# Altium PCB chinook_pcb_rotor.PcbDoc (part 1 of 2)
Units mil, origin at the board's own origin, x right, y up, seen from the top; angles counter-clockwise.
Board outline 4240 x 2750 mil, 2 copper layers (Top Layer, Bottom Layer); 69 components, 52 nets, 279 pads, 85 vias.
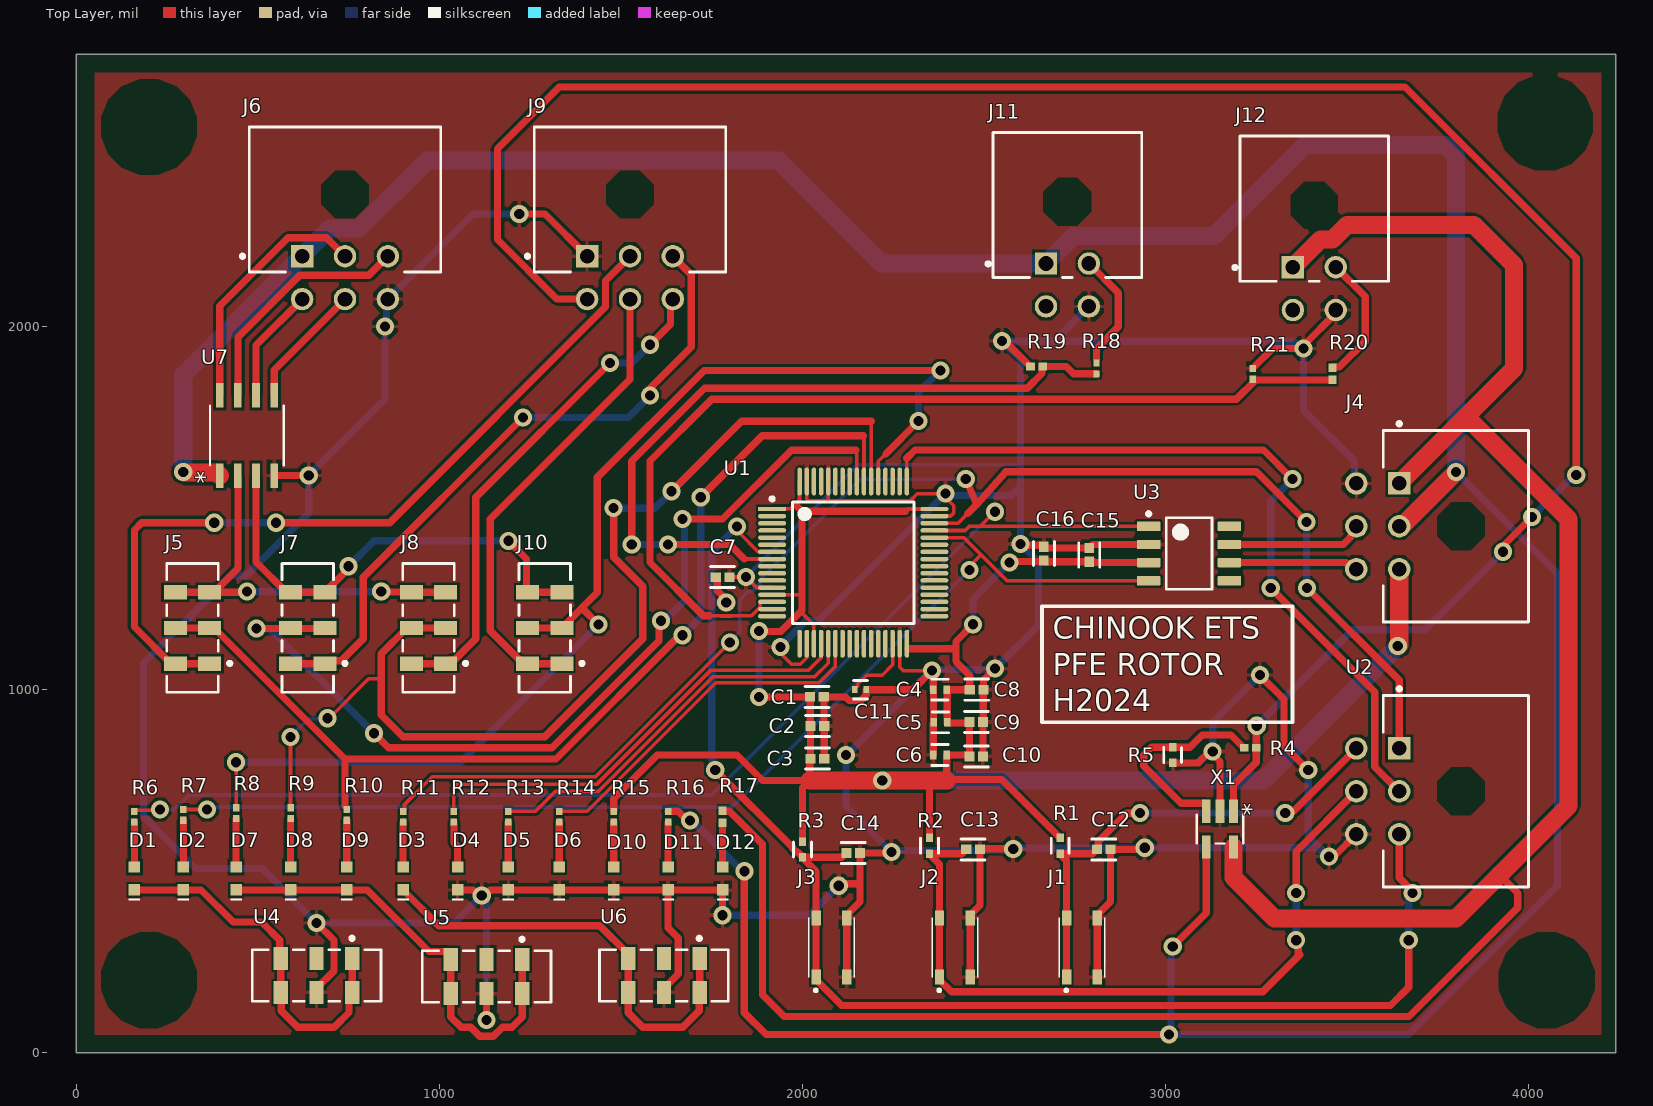
[diagram p0: Top Layer view]
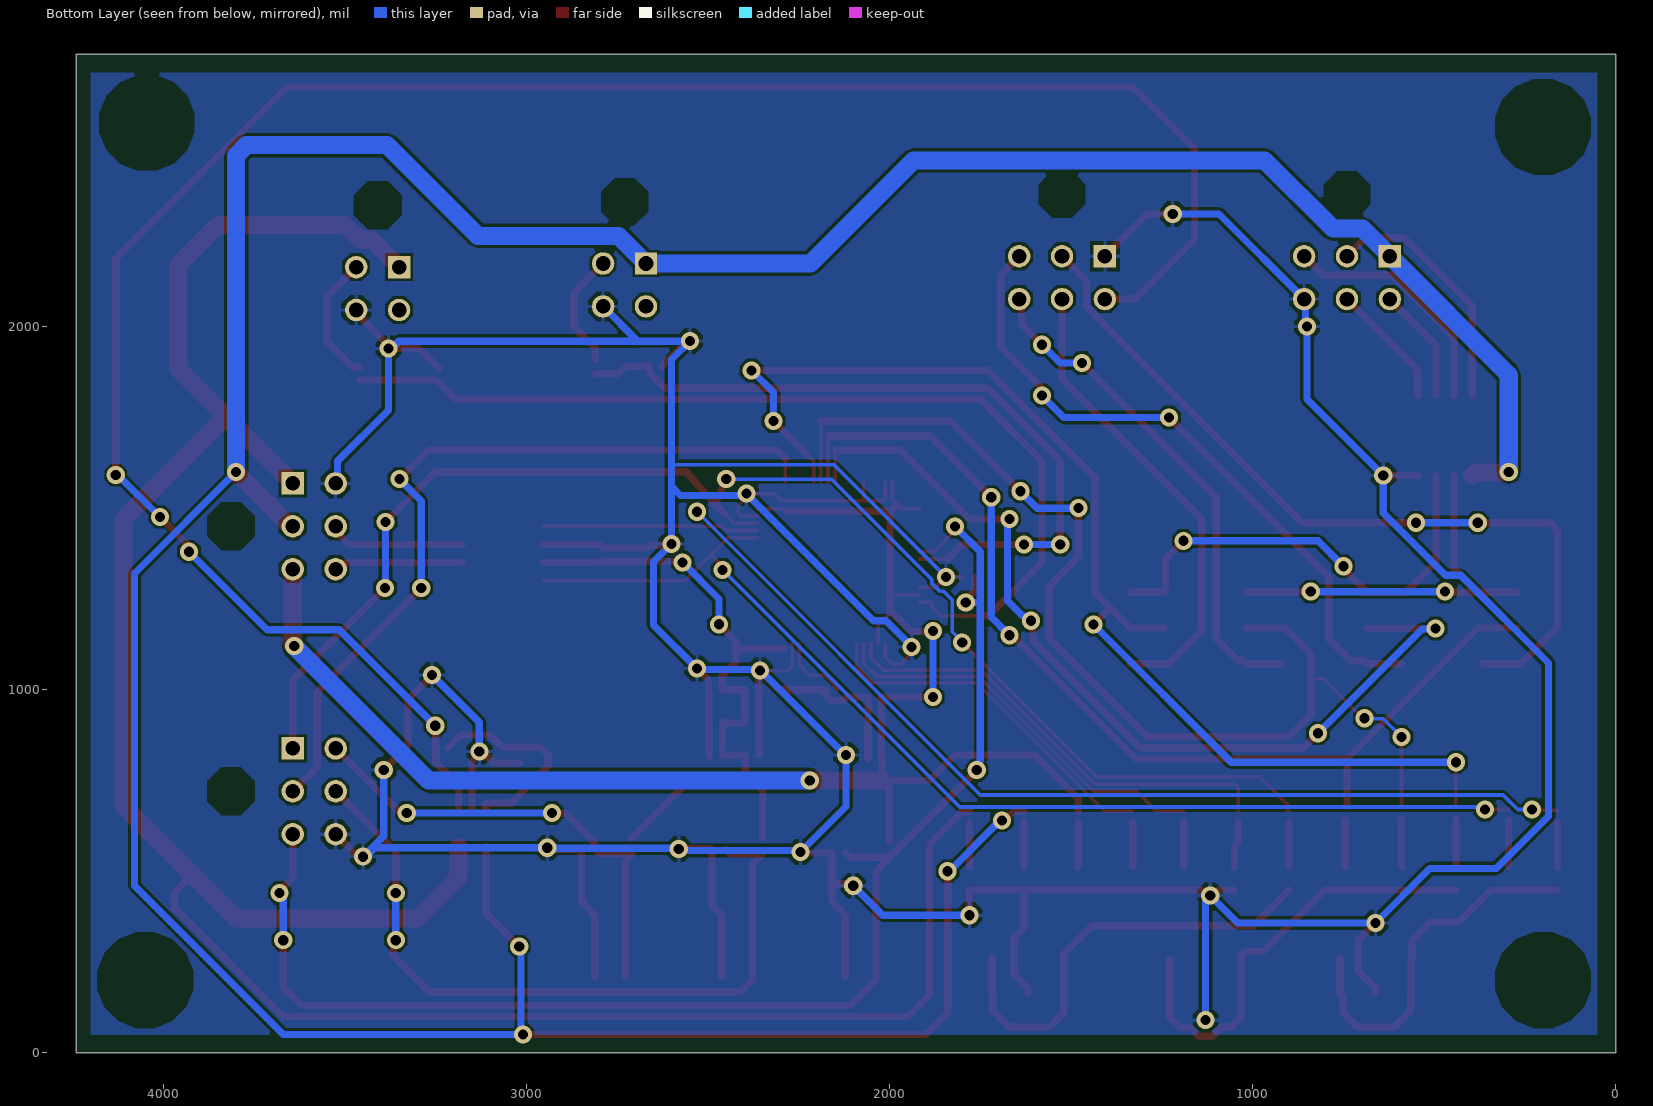
[diagram p1: Bottom Layer view, seen from below]
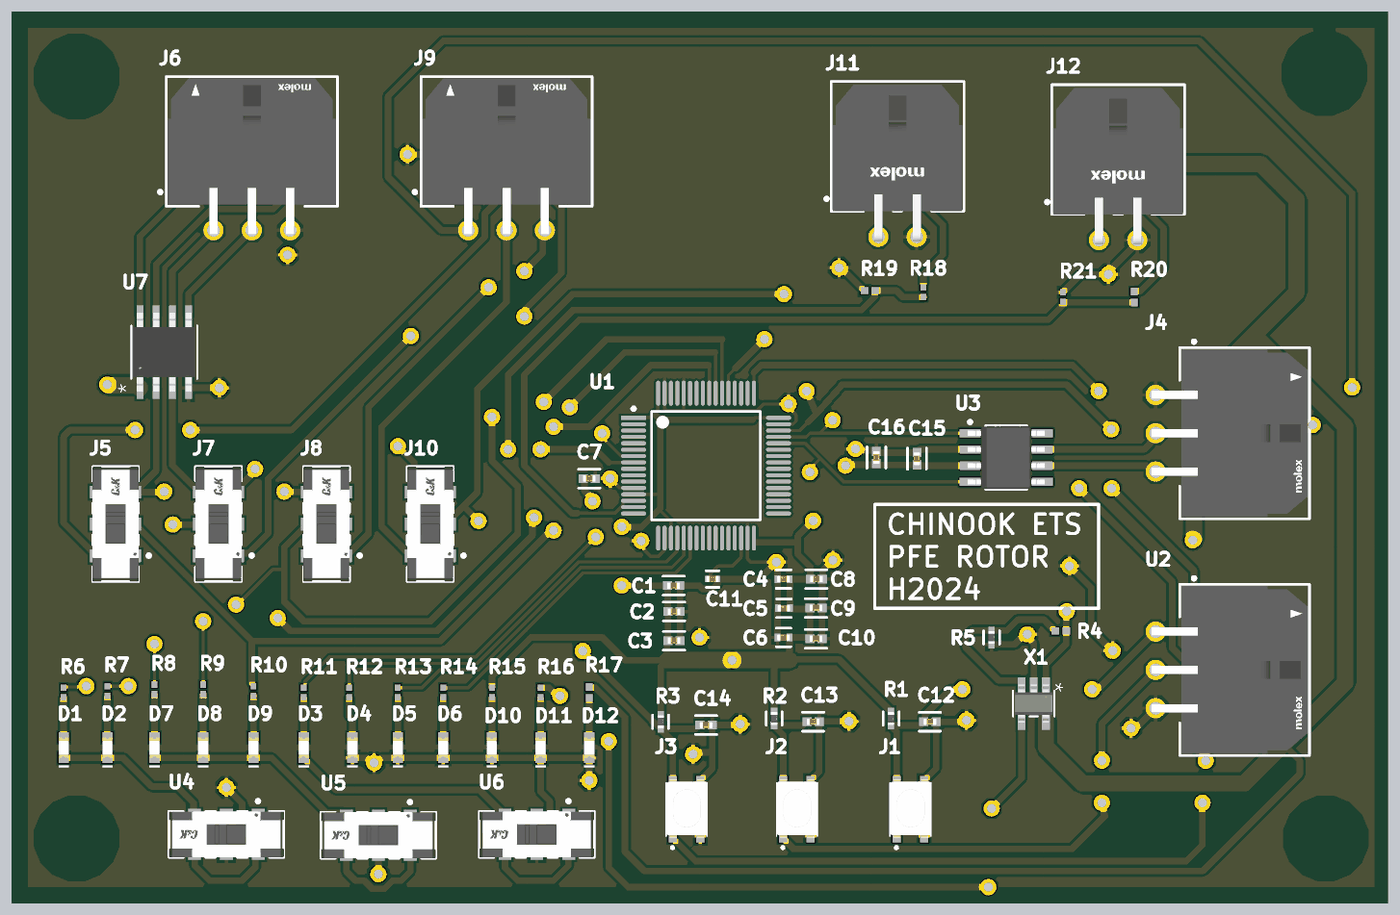
[diagram p2: 3D render of the assembled board from above, using the file's embedded part models]

## Layer stack, top to bottom
Top Solder: solder mask 0.4, Solder Resist, Dk 3.5
Top Layer: signal copper 1.4
Dielectric 1: dielectric 12.6, FR-4, Dk 4.8
Bottom Layer: signal copper 1.4
Bottom Solder: solder mask 0.4, Solder Resist, Dk 3.5

## Board outline
0,0 4240,0 4240,2750 0,2750

## Design rules (kind name [scope] priority, off if disabled: settings)
Clearance constraint [All] p1: gap=7 ignorepadtopadclearanceinfootprint=FALSE
Clearance [All] p2: gap=10 ignorepadtopadclearanceinfootprint=FALSE
HoleSize [All] p1: absolutevalues=TRUE maxlimit=150 minlimit=1 maxpercent=80.000 minpercent=20.000
PolygonConnect [All] p1: connectstyle=Relief reliefconductorwidth=10 reliefentries=4 polygonreliefangle="90 Angle" airgapwidth=10
RoutingVias [All] p1: holewidth=28 width=50 viastyle="Through Hole" minholewidth=28 minwidth=50 maxholewidth=28 maxwidth=50
SolderMaskExpansion [All] p1: expansion=4 istentingtop=FALSE
Width [All] p1: maxlimit=50 minlimit=10 preferedwidth=20
29 further rules are at their usual default settings.

## Classes and differential pairs
component class MCU: C1 C2 C3 C4 C5 C6 C7 C8 C9 C10 C11 U1
component class led: D1 D2 D3 D4 D5 D6 D7 D8 D9 D10 D11 D12 R6 R7 R8 R9 R10 R11 R12 R13 R14 R15 R16 R17 U4 U5 U6
component class encodeur_rotor_rpm: J11 R18 R19
component class encodeur_pale: J5 J6 J7 J8 J9 J10 U7
component class debug: C12 C13 C14 J1 J2 J3 R1 R2 R3 U2
component class connecteur_principal: J4
component class capteur_couple: J12 R20 R21
component class can: C15 C16 U3
component class alimentation: R4 R5 X1

## Components (designator, comment, footprint, x,y, rotation, side; value= is the part's Value field where it differs from the comment)
C1 "1uF" FP-GRM155-0_05-IPC_A 2040,980 r0 top
C2 "1uF" FP-GRM155-0_05-IPC_A 2041.16,900 r0 top
C3 "1uF" FP-GRM155-0_05-IPC_A 2041.16,810 r0 top
C4 "10uF" FP-GRM155-0_15-MFG 2378.7,1000 r180 top
C5 "10uF" FP-GRM155-0_15-MFG 2380,910 r180 top
C6 "10uF" FP-GRM155-0_15-MFG 2378.7,820 r180 top
C7 "100nF" FP-CL278-IPC_A 1780,1310 r0 top
C8 "100nF" FP-CL278-IPC_A 2480,1000 r0 top
C9 "100nF" FP-CL278-IPC_A 2478.84,911.01 r0 top
C10 "100nF" FP-CL278-IPC_A 2478.84,816.01 r0 top
C11 "2.2uF" FP-GRM155-0_05-MFG 2160,1000 r0 top
C12 "100nF" FP-CL278-IPC_A 2830,560 r0 top
C13 "100nF" FP-CL278-IPC_A 2470,560 r0 top
C14 "100nF" FP-CL278-IPC_A 2140,550 r0 top
C15 "1uF" FP-GRM155-0_05-IPC_A 2790,1371.16 r90 top
C16 "100nF" FP-CL278-IPC_A 2665,1375 r90 top
D1 "Green led 0603" WL-SMCW_0603_150060xx75000 160,480 r90 top
D2 "Green led 0603" WL-SMCW_0603_150060xx75000 295,480 r90 top
D3 "Green led 0603" WL-SMCW_0603_150060xx75000 900,480 r90 top
D4 "Green led 0603" WL-SMCW_0603_150060xx75000 1050,480 r90 top
D5 "Green led 0603" WL-SMCW_0603_150060xx75000 1190,480 r90 top
D6 "Green led 0603" WL-SMCW_0603_150060xx75000 1330,480 r90 top
D7 "Green led 0603" WL-SMCW_0603_150060xx75000 440,480 r90 top
D8 "Green led 0603" WL-SMCW_0603_150060xx75000 590,480 r90 top
D9 "Green led 0603" WL-SMCW_0603_150060xx75000 745,480 r90 top
D10 "Green led 0603" WL-SMCW_0603_150060xx75000 1480,480 r90 top
D11 "Green led 0603" WL-SMCW_0603_150060xx75000 1630,480 r90 top
D12 "Green led 0603" WL-SMCW_0603_150060xx75000 1780,480 r90 top
J1 "bouton off default" PTS810SJG250SMTRLFS 2770,290 r90 top
J2 "bouton off default" PTS810SJG250SMTRLFS 2420,290 r90 top
J3 "bouton off default" PTS810SJG250SMTRLFS 2080,290 r90 top
J4 "micro-fit 3.0 6 pins female pcb" FP-0430450600-MFG 3800,1450 r90 top
J5 "Switch on off" FP-JS202011JCQN-MFG 320,1170 r90 top
J6 "micro-fit 3.0 6 pins female pcb" FP-0430450600-MFG 740,2350 r180 top
J7 "Switch on off" FP-JS202011JCQN-MFG 637.24,1170 r90 top
J8 "Switch on off" FP-JS202011JCQN-MFG 970,1170 r90 top
J9 "micro-fit 3.0 6 pins female pcb" FP-0430450600-MFG 1525,2350 r180 top
J10 "Switch on off" FP-JS202011JCQN-MFG 1290,1170 r90 top
J11 "micro-fit 3.0 4 pins female pcb" FP-43045-0400-MFG 2730,2330 r180 top
J12 "micro-fit 3.0 4 pins female pcb" FP-43045-0400-MFG 3410,2320 r180 top
R1 "10kOhms" FP-RC1005-MFG 2710,570 r90 top value=10kR
R2 "10kOhms" FP-RC1005-MFG 2350,570 r90 top value=10kR
R3 "10kOhms" FP-RC1005-MFG 2000,560 r90 top value=10kR
R4 "14kOhms" RESC1005X40X25NL05T10 3233.27,840 r0 top
R5 "10kOhms" FP-RC1005-MFG 3020,820 r90 top value=10kR
R6 "68Ohms" RESC1005X40X25LL05T10 160,650 r90 top value=68R
R7 "68Ohms" RESC1005X40X25LL05T10 295,655 r90 top value=68R
R8 "68Ohms" RESC1005X40X25LL05T10 440,660 r90 top value=68R
R9 "68Ohms" RESC1005X40X25LL05T10 590,660 r90 top value=68R
R10 "68Ohms" RESC1005X40X25LL05T10 745,655 r90 top value=68R
R11 "68Ohms" RESC1005X40X25LL05T10 900,650 r90 top value=68R
R12 "68Ohms" RESC1005X40X25LL05T10 1040,650 r90 top value=68R
R13 "68Ohms" RESC1005X40X25LL05T10 1190,650 r90 top value=68R
R14 "68Ohms" RESC1005X40X25LL05T10 1330,650 r90 top value=68R
R15 "68Ohms" RESC1005X40X25LL05T10 1480,650 r90 top value=68R
R16 "150Ohms" RESC1005X40X25LL05T10 1630,650 r90 top value=150R
R17 "1.15kOhms" RESC1005X40X25NL05T10 1780,650 r90 top value=1.15kR
R18 "66.5kOhms" RESC1005X40X25LL05T10 2810,1884.76 r90 top value=66.5kR
R19 "100kOhms" RESC1005X40X25NL05T10 2645,1890 r0 top value=100kR
R20 "100kOhms" RESC1005X40X25NL05T10 3460,1870 r90 top value=100kR
R21 "49.9kOhms" RESC1005X40X25LL05T10 3240,1870 r270 top
U1 "STM32F446RET6" FP-LQFP64-5W-IPC_A 2140,1350 r0 top
U2 "micro-fit 3.0 6 pins female pcb" FP-0430450600-MFG 3800,720 r90 top
U3 "CANbus tranceiver" D0008A_M 3065,1375 r0 top
U4 "Switch on off" FP-JS202011JCQN-MFG 661.57,212.76 r180 top
U5 "Switch on off" FP-JS202011JCQN-MFG 1130,210 r180 top
U6 "Switch on off" FP-JS202011JCQN-MFG 1618.43,212.76 r180 top
U7 "Tranceiver rs485/rs422" 21-0041_S8+2_MXM-M 470,1700 r90 top
X1 "amp-op" SOT23-5_STM-M 3150,616 r270 top

## Footprints (in the part's own frame and the unit in brackets; to place one, negate y for a bottom-side part, rotate by r counter-clockwise, add the part's x,y. Pads: shape width x height; smd on the part's side, far side on the other; paste and mask are expansions set on the pad)
21-0041_S8+2_MXM-M [mil]
  rect 67.05x21 smd paste+0 mask+0: 1(-110.52,75) 2(-110.52,25) 3(-110.52,-25) 4(-110.52,-75) 5(110.52,-75) 6(110.52,-25) 7(110.52,25) 8(110.52,75)
  silkscreen extent -82,-102 82,102, body extent -122,-96 122,96, height 69
D0008A_M [mm] "SOIC, 8-Leads, Body 5x4mm, Pitch 1.27mm, IPC Low Density"
  rrect15% 1.65x0.65 smd: 1(-2.825,1.905) 2(-2.825,0.635) 3(-2.825,-0.635) 4(-2.825,-1.905) 5(2.825,-1.905) 6(2.825,-0.635) 7(2.825,0.635) 8(2.825,1.905)
  silkscreen extent -2.95,-2.5 1.6,2.9, body extent -3,-2.45 3,2.45, height 1.63
FP-43045-0400-MFG [mm]
  rect 1.57x1.57 hole 1.02 paste-2539.97 mask+0: 1(1.5,3.965)
  round 1.57 hole 1.02 paste-2539.97 mask+0: 2(-1.5,3.965) 3(1.5,6.965) 4(-1.5,6.965)
  round 3 on Mech1 paste-2539.97 mask+0: ""(0,-0.355)
  silkscreen extent -5.2,-5.21 5.67,4.95, body extent -5.3,-5.31 5.3,7.85, height 0.25
FP-0430450600-MFG [mm]
  rect 1.57x1.57 hole 1.02 paste-2539.97 mask+0: 1(3,3.965)
  round 1.57 hole 1.02 paste-2539.97 mask+0: 2(0,3.965) 3(-3,3.965) 4(3,6.965) 5(0,6.965) 6(-3,6.965)
  round 3 on Mech1 paste-2539.97 mask+0: ""(0,-0.355)
  silkscreen extent -6.7,-5.08 7.3,5.08, body extent -6.8,-5.18 6.8,7.85, height 0.25
FP-CL278-IPC_A [mil]
  rect 28.16x26.48 smd paste+0 mask+0: 1(-18.84,0) 2(18.84,0)
  silkscreen extent -33,-29 33,29, body extent -41,-21 41,21, height 10
FP-GRM155-0_05-IPC_A [mil]
  rect 28.16x26.48 smd paste+0 mask+0: 1(-18.84,0) 2(18.84,0)
  silkscreen extent -33,-29 33,29, body extent -41,-21 41,21, height 10
FP-GRM155-0_05-MFG [mm]
  rect 0.4x0.5 smd paste+0 mask+0: 1(-0.4,0) 2(0.4,0)
  silkscreen extent -0.5,-0.65 0.5,0.65, body extent -0.7,-0.38 0.7,0.38, height 0.25
FP-GRM155-0_15-MFG [mm]
  rect 0.45x0.6 smd paste+0 mask+0: 1(-0.475,0) 2(0.475,0)
  silkscreen extent -0.58,-0.73 0.58,0.72, body extent -0.8,-0.43 0.8,0.43, height 0.25
FP-JS202011JCQN-MFG [mm]
  rect 1x1.6 smd paste+0 mask+0: 1(-2.5,-1.2) 2(0,-1.2) 3(2.5,-1.2) 5(-2.5,1.2) 6(0,1.2) 7(2.5,1.2)
  silkscreen extent -4.5,-2.73 4.5,1.8, body extent -4.6,-2.1 4.6,2.1, height 0.25
FP-LQFP64-5W-IPC_A [mm]
  rect 1.955x0.312 smd paste+0 mask+0: 1(-5.675,3.75)
  rrect100% 1.955x0.312 smd paste+0 mask+0: 2(-5.675,3.25) 3(-5.675,2.75) 4(-5.675,2.25) 5(-5.675,1.75) 6(-5.675,1.25) 7(-5.675,0.75) 8(-5.675,0.25) 9(-5.675,-0.25) 10(-5.675,-0.75) 11(-5.675,-1.25) 12(-5.675,-1.75) 13(-5.675,-2.25) 14(-5.675,-2.75) 15(-5.675,-3.25) 16(-5.675,-3.75) 33(5.675,-3.75) 34(5.675,-3.25) 35(5.675,-2.75) 36(5.675,-2.25) 37(5.675,-1.75) 38(5.675,-1.25) 39(5.675,-0.75) 40(5.675,-0.25) 41(5.675,0.25) 42(5.675,0.75) 43(5.675,1.25) 44(5.675,1.75) 45(5.675,2.25) 46(5.675,2.75) 47(5.675,3.25) 48(5.675,3.75)
  rrect100% 0.312x1.955 smd paste+0 mask+0: 17(-3.75,-5.675) 18(-3.25,-5.675) 19(-2.75,-5.675) 20(-2.25,-5.675) 21(-1.75,-5.675) 22(-1.25,-5.675) 23(-0.75,-5.675) 24(-0.25,-5.675) 25(0.25,-5.675) 26(0.75,-5.675) 27(1.25,-5.675) 28(1.75,-5.675) 29(2.25,-5.675) 30(2.75,-5.675) 31(3.25,-5.675) 32(3.75,-5.675) 49(3.75,5.675) 50(3.25,5.675) 51(2.75,5.675) 52(2.25,5.675) 53(1.75,5.675) 54(1.25,5.675) 55(0.75,5.675) 56(0.25,5.675) 57(-0.25,5.675) 58(-0.75,5.675) 59(-1.25,5.675) 60(-1.75,5.675) 61(-2.25,5.675) 62(-2.75,5.675) 63(-3.25,5.675) 64(-3.75,5.675)
  silkscreen extent -5.8,-4.25 4.25,4.58
FP-RC1005-MFG [mm]
  rect 0.6x0.5 smd paste+0 mask+0: 1(-0.55,0) 2(0.55,0)
  silkscreen extent -0.53,-0.63 0.53,0.63, body extent -0.95,-0.38 0.95,0.38, height 0.25
PTS810SJG250SMTRLFS [mm]
  rect 1.05x0.65 smd: 1(-2.075,1.075) 2(2.075,1.075) 3(-2.075,-1.075) 4(2.075,-1.075)
  silkscreen extent -3.1,-1.6 2.07,1.6, body extent -2.23,-1.62 2.37,1.58, height 2.7
RESC1005X40X25LL05T10 [mm] "Chip Resistor, 2-Leads, Body 1.00x0.50mm, IPC High Density"
  rect 0.5x0.45 smd: 1(-0.375,0) 2(0.375,0)
  body extent -0.53,-0.27 0.53,0.28, height 0.4
RESC1005X40X25NL05T10 [mm] "Chip Resistor, 2-Leads, Body 1.00x0.50mm, IPC Medium Density"
  rect 0.6x0.55 smd: 1(-0.425,0) 2(0.425,0)
  body extent -0.53,-0.27 0.53,0.28, height 0.4
SOT23-5_STM-M [mil]
  rect 64x24 smd paste+0 mask+0: 1(-49,37.4) 2(-49,0) 3(-49,-37.4) 4(49,-37.4) 5(49,37.4)
  silkscreen extent -40,-64 40,64, body extent -59,-59 59,59, height 57
WL-SMCW_0603_150060xx75000 [mm] "SMD Mono-color Chip LED, body 1.6x0.8mm"
  rect 0.8x0.8 smd: 1(-0.8,0) 2(0.8,0)
  silkscreen extent -1.55,-0.4 -1.4,0.4, body extent -0.8,-0.4 0.8,0.4, height 0.7

## Part data
C1 C2 C3 C15: library part GRM155R61E105MA12D, "Multilayer Ceramic Capacitor, 1 uF, 25 V, ± 20%, X5R, 0402 [1005 Metric]", Case Code (Imperial)=0402, Case Code (Metric)=1005, Dielectric=X5R, Manufacturer=Murata, Max Operating Temperature=85°C, Min Operating Temperature=-55°C, Package Quantity=10000, Supplier Part Number=490-10018-1-ND, Tolerance=20%, Voltage Rating=25V, Case/Package=0402, Category="Ceramic Capacitors", ComponentLink1Description=http://www.mouser.com/ds/2/281/c02e-2905.pdf?src-supplier=Mouser, ComponentLink1URL=http://www.mouser.com/ds/2/281/c02e-2905.pdf?src-supplier=Mouser, ComponentLink2Description=https://datasheet.octopart.com/GRM155R61E105MA12D-Murata-datasheet-149523023.pdf?src-supplier=Newark, ComponentLink2URL=https://datasheet.octopart.com/GRM155R61E105MA12D-Murata-datasheet-149523023.pdf?src-supplier=Newark, ComponentLink3Description=https://datasheet.octopart.com/GRM155R61E105MA12D-Murata-datasheet-22122223.pdf?src-supplier=Future+Electronics, ComponentLink3URL=https://datasheet.octopart.com/GRM155R61E105MA12D-Murata-datasheet-22122223.pdf?src-supplier=Future+Electronics, ComponentLink4Description=http://search.murata.co.jp/Ceramy/image/img/A01X/G101/ENG/GRM155R61E105MA12-01.pdf?src-supplier=Digikey, ComponentLink4URL=http://search.murata.co.jp/Ceramy/image/img/A01X/G101/ENG/GRM155R61E105MA12-01.pdf?src-supplier=Digikey, Height=0.5mm, Length=0.039inch, Manufacturer Part Number=GRM155R61E105MA12D, Mounting Technology="Surface Mount", Packaging="Tape and Reel", Pricing="1=0.1, 10=0.066, 50=0.0376, 100=0.0292, 500=0.022, 1000=0.01728, 2500=0.01571, 5000=0.01445 (USD)", RoHS=Yes, RoHS Compliant=Yes, Series=GRM, Stock=2496490, Supplier=Digikey, Termination=SMD/SMT, Thickness=0.022inch, Voltage Rating (DC)=25V, Weight=0.000212oz, Width=0.02inch
C4 C5 C6: library part GRM155R60J106ME15D, "Multilayer Ceramic Capacitor, 10 uF, 6.3 V, ± 20%, X5R, 0402 [1005 Metric]", Case Code (Imperial)=0402, Case Code (Metric)=1005, Dielectric=X5R, Manufacturer=Murata, Max Operating Temperature=85°C, Min Operating Temperature=-55°C, Supplier Part Number=490-13238-1-ND, Tolerance=20%, Voltage Rating=6.3V, Case/Package=0402, Category="Ceramic Capacitors", ComponentLink1Description=https://datasheet.octopart.com/GRM155R60J106ME15D-Murata-datasheet-149522992.pdf?src-supplier=Newark, ComponentLink1URL=https://datasheet.octopart.com/GRM155R60J106ME15D-Murata-datasheet-149522992.pdf?src-supplier=Newark, ComponentLink2Description=https://www.murata.com/~/media/webrenewal/support/library/catalog/products/capacitor/mlcc/c02e.ashx?la=en-us&src-supplier=Digikey, ComponentLink2URL=https://www.murata.com/~/media/webrenewal/support/library/catalog/products/capacitor/mlcc/c02e.ashx?la=en-us&src-supplier=Digikey, ComponentLink3Description=https://datasheet.octopart.com/GRM155R60J106ME15D-Murata-datasheet-165579666.pdf?src-supplier=TME, ComponentLink3URL=https://datasheet.octopart.com/GRM155R60J106ME15D-Murata-datasheet-165579666.pdf?src-supplier=TME, Height=650um, Length=0.039inch, Manufacturer Part Number=GRM155R60J106ME15D, Material=4241ConductorMaterial, Mounting Technology="Surface Mount", Packaging="Cut Tape", Pricing="1=0.17, 10=0.11, 50=0.0696, 100=0.0557, 500=0.04022, 1000=0.03558, 2500=0.03404, 5000=0.03094 (USD)", RoHS=Yes, RoHS Compliant=Yes, Series=GRM, Stock=6215687, Supplier=Digikey, Thickness=0.026inch, Voltage Rating (DC)=6.3V, Width=0.02inch
C7 C8 C9 C10 C12 C13 C14 C16: library part CL05A104KA5NNNC, "Multilayer Ceramic Capacitor, 0.1 uF, 25 V, ± 10%, X5R, 0402 [1005 Metric]", Case Code (Imperial)=0402, Case Code (Metric)=1005, Dielectric=X5R, Manufacturer=Samsung, Max Operating Temperature=85°C, Min Operating Temperature=-55°C, Package Quantity=1, Supplier Part Number=1276-1043-1-ND, Tolerance=10%, Voltage=25V, Case/Package=0402, Category="Ceramic Capacitors", ComponentLink1Description=https://datasheet.ciiva.com/25802/cl05a104ka5nnnc-25802704.pdf?src-supplier=Digikey, ComponentLink1URL=https://datasheet.ciiva.com/25802/cl05a104ka5nnnc-25802704.pdf?src-supplier=Digikey, ComponentLink2Description=https://datasheet.ciiva.com/16437/cl05a104ka5nnnc-16437369.pdf?src-supplier=Future+Electronics, ComponentLink2URL=https://datasheet.ciiva.com/16437/cl05a104ka5nnnc-16437369.pdf?src-supplier=Future+Electronics, ComponentLink3Description=https://datasheet.ciiva.com/26838/getdatasheetpartid-357412-26838142.pdf?src-supplier=Verical, ComponentLink3URL=https://datasheet.ciiva.com/26838/getdatasheetpartid-357412-26838142.pdf?src-supplier=Verical, ComponentLink4Description=https://datasheet.ciiva.com/26309/mlcc-catalogdownload2013-eng-26309014.pdf?src-supplier=Distrelec, ComponentLink4URL=https://datasheet.ciiva.com/26309/mlcc-catalogdownload2013-eng-26309014.pdf?src-supplier=Distrelec, Construction=Flat, Depth=0.5mm, Height=0.5mm, Lead Free="Lead Free", Length=1mm, Manufacturer Part Number=CL05A104KA5NNNC, Material=4241ConductorMaterial, Mounting Technology="Surface Mount", Packaging="Tape and Reel", Pricing="1=0.1, 10=0.01, 50=0.0054, 100=0.0042, 500=0.00318, 1000=0.0025, 2500=0.00227, 5000=0.00209 (USD)", Radiation Hardening=No, RoHS=Yes, RoHS Compliant=Yes, Series=CL, Stock=11930039, Supplier=Digikey, Thickness=0.022inch, Voltage Rating=25V, Voltage Rating (DC)=25V, Width=0.02inch
C11: library part GRM155C80J225KE95D, "Cap Ceramic 2.2uF 6.3V X6S 10% Pad SMD 0402 105°C T/R", Case Code (Imperial)=0402, Case Code (Metric)=1005, Manufacturer=Murata, Max Operating Temperature=105°C, Min Operating Temperature=-55°C, Supplier Part Number=490-10012-1-ND, Tolerance=10%, Voltage Rating=6.3V, Case/Package=0402, Category="Ceramic Capacitors", ComponentLink1Description=http://search.murata.co.jp/Ceramy/image/img/A01X/G101/ENG/GRM155C80J225KE95-01.pdf?src-supplier=Digikey, ComponentLink1URL=http://search.murata.co.jp/Ceramy/image/img/A01X/G101/ENG/GRM155C80J225KE95-01.pdf?src-supplier=Digikey, ComponentLink2Description=http://search.murata.co.jp/Ceramy/image/img/A01X/partnumbering_e_01.pdf?src-supplier=Digikey, ComponentLink2URL=http://search.murata.co.jp/Ceramy/image/img/A01X/partnumbering_e_01.pdf?src-supplier=Digikey, ComponentLink3Description=https://datasheet.octopart.com/GRM155C80J225KE95D-Murata-datasheet-32479577.pdf?src-supplier=Future+Electronics, ComponentLink3URL=https://datasheet.octopart.com/GRM155C80J225KE95D-Murata-datasheet-32479577.pdf?src-supplier=Future+Electronics, ComponentLink4Description=https://datasheet.octopart.com/GRM155C80J225KE95D-Murata-datasheet-165579666.pdf?src-supplier=TME, ComponentLink4URL=https://datasheet.octopart.com/GRM155C80J225KE95D-Murata-datasheet-165579666.pdf?src-supplier=TME, Height=0.3mm, Length=0.039inch, Manufacturer Part Number=GRM155C80J225KE95D, Material=Ceramic, Mounting Technology="Surface Mount", Packaging="Cut Tape", Pricing="1=0.1, 10=0.054, 50=0.031, 100=0.0241, 500=0.01814, 1000=0.01425, 2500=0.01296, 5000=0.01192 (USD)", RoHS=Yes, RoHS Compliant=Yes, Series=GRM, Stock=6441444, Supplier=Digikey, Thickness=0.022inch, Voltage Rating (DC)=6.3V, Width=0.02inch
D1 D2 D3 D4 D5 D6 D7 D8 D9 D10 D11 D12: library part 150060VS75000, "WURTH ELEKTRONIK - 150060VS75000 - LED, Green, SMD, 0603, 30 mA, 2 V, 570 nm", Case Code (Imperial)=0603, Case Code (Metric)=1608, Color=Green, Forward Current=20mA, Forward Voltage=2V, Lens Color=Colorless, Manufacturer="Wurth Electronics", Max Operating Temperature=85°C, Max Reverse Voltage (DC)=5V, Min Operating Temperature=-40°C, Package Quantity=4000, Power Dissipation=72mW, Supplier Part Number=732-4980-1-ND, Case/Package=0603, Category=LEDs, ComponentLink1Description=https://datasheet.ciiva.com/29562/150060vs75000-29562919.pdf?src-supplier=Digikey, ComponentLink1URL=https://datasheet.ciiva.com/29562/150060vs75000-29562919.pdf?src-supplier=Digikey, Dominant Wavelength=570nm, Height=0.8mm, Illumination Color=Green, Length=1.6mm, Lens Size=0.7mm, Lens Style=Rectangular,Flat, Lens Transparency=Clear, Luminous Intensity=40mcd, Manufacturer Part Number=150060VS75000, Mounting Technology="Surface Mount", Packaging="Cut Tape", Pins=2, Power Rating=72mW, Pricing="1=0.15, 50=0.142, 100=0.122, 500=0.105, 1000=0.10125 (USD)", Reach SVHC Compliant=4187SVHC, Reverse Voltage=5V, Reverse Voltage (DC)=5V, RoHS=Yes, RoHS Compliant=Yes, Series=WL-SMCW, Stock=75022, Supplier=Digikey, Test Current=20mA, Viewing Angle=140°, Weight=0.000882oz, Width=0.8mm
J1 J2 J3: library part PTS810SJK250SMTRLFS, "Switch Tactile N.O. SPST Button J-Bend 0.05A 16VDC 50000Cycle 2.55N SMD T/R", Case/Package=SMD/SMT, Color=White, Current Rating=50mA, Manufacturer="ITT C&K", Max Operating Temperature=85°C, Min Operating Temperature=-40°C, Operating Force=260gf, Package Quantity=2900, Supplier Part Number=CKN10503CT-ND, Voltage Rating (DC)=16V, Category="Tactile Switches", ComponentLink1Description=https://datasheet.ciiva.com/18514/pts810-4mar13-18514062.pdf?src-supplier=Digikey, ComponentLink1URL=https://datasheet.ciiva.com/18514/pts810-4mar13-18514062.pdf?src-supplier=Digikey, ComponentLink2Description=https://datasheet.ciiva.com/18514/pts810-4mar13-18514063.pdf?src-supplier=Digikey, ComponentLink2URL=https://datasheet.ciiva.com/18514/pts810-4mar13-18514063.pdf?src-supplier=Digikey, ComponentLink3Description=https://datasheet.ciiva.com/18514/pts810-4mar13-18514061.pdf?src-supplier=Digikey, ComponentLink3URL=https://datasheet.ciiva.com/18514/pts810-4mar13-18514061.pdf?src-supplier=Digikey, Contact Plating=Silver, Illumination Type=Non-Illuminated, Lead Free="Lead Free", Manufacturer Part Number=PTS810SJK250SMTRLFS, Mechanical Life=50000Cycles, Mounting Technology="Surface Mount", Packaging="Tape and Reel", Pricing="1=0.34, 10=0.325, 25=0.306, 100=0.2657, 250=0.24104, 500=0.22422, 1000=0.2018 (USD)", RoHS=Yes, RoHS Compliant=Yes, Series=PTS810, Stock=151502, Supplier=Digikey, Switch Function=Off-Mom, Switch Travel=0.15mm, Throw Configuration=SPST
J4 J6 J9 U2: library part 430450600, "Connector Wire to Board Header 6 Position 3mm Solder Right Angle Thru-Hole Tray", Case/Package=SMC, Color=Black, Contact Resistance=10mR, Current Rating=5A, Flammability Rating="UL94 V-0", Insulation Resistance=1GR, Manufacturer=Molex, Manufacturer Part Number=43045-0600, Max Operating Temperature=105°C, Max Voltage Rating (DC)=250.25kV, Min Operating Temperature=-40°C, Package Quantity=1728, Supplier Part Number=WM1815-ND, Voltage Rating=250V, Approvals=UL,CSA,TUV, Category="Headers and Wire Housings", Contact Material=Brass,Tin, Contact Plating=Tin, Depth=12.2mm, Diameter=3mm, Gender=Male, Glow Wire Compliant=15Compliance, Halogen Free=5696HalogenFree, Height=8.77mm, Housing Color=Black, Housing Material=Thermoplastic, Lead Free=5697LeadFree, Length=13.15mm, Material=4301ConductorMaterial, Max Current Rating=5A, Mounting Technology="Through Hole", Number of Circuits=6, Number of Contacts=6, Number of Positions=6, Number of Rows=2, Orientation="Right Angle", Packaging=Tray, Pitch=3mm, Plating=154ConductorMaterial, Pricing="1=2.2, 10=1.875, 80=1.54863, 1728=1.18185, 5184=1.08404 (USD)", Radiation Hardening=No, Reach SVHC Compliant=Unknown, RoHS=Yes, RoHS Compliant=Yes, Row Spacing=3mm, Series=43045, Stock=3053, Supplier=Digikey, Termination=Solder, Voltage Rating (DC)=250V
J5 J7 J8 J10: "SWITCH SLIDE DPDT 300mA 6V", Manufacturer="ITT C&K", Manufacturer Part Number=JS202011JCQN, Max Operating Temperature=85°C, Min Operating Temperature=-40°C, Supplier Part Number=CKN10723CT-ND, Voltage Rating (DC)=6V, Actuator Length=2mm, Actuator Material=Nylon,Polyamide,PA46, Actuator Type=Standard, Category="Slide Switches", ComponentLink1Description=http://www.farnell.com/datasheets/2674788.pdf?src-supplier=Farnell, ComponentLink1URL=http://www.farnell.com/datasheets/2674788.pdf?src-supplier=Farnell, ComponentLink2Description=http://www.farnell.com/datasheets/2674788.pdf?src-supplier=Element14, ComponentLink2URL=http://www.farnell.com/datasheets/2674788.pdf?src-supplier=Element14, ComponentLink3Description=https://datasheet.octopart.com/JS202011JCQN-C%26K-Components-datasheet-67873653.pdf?src-supplier=Newark, ComponentLink3URL=https://datasheet.octopart.com/JS202011JCQN-C%26K-Components-datasheet-67873653.pdf?src-supplier=Newark, ComponentLink4Description=http://www.farnell.com/datasheets/2674788.pdf?src-supplier=Newark, ComponentLink4URL=http://www.farnell.com/datasheets/2674788.pdf?src-supplier=Newark, ComponentLink5Description=https://www.ckswitches.com/media/1422/js.pdf?src-supplier=Digikey, ComponentLink5URL=https://www.ckswitches.com/media/1422/js.pdf?src-supplier=Digikey, ComponentLink6Description=https://datasheet.octopart.com/JS202011JCQN-C%26K-Components-datasheet-138126065.pdf?src-supplier=TME, ComponentLink6URL=https://datasheet.octopart.com/JS202011JCQN-C%26K-Components-datasheet-138126065.pdf?src-supplier=TME, Contact Material="Copper Alloy", Contact Plating=Silver, Electrical Life=5000Cycles, Mounting Technology="Surface Mount", Packaging="Cut Tape", Pricing="1=0.8, 10=0.769, 25=0.74, 100=0.6422, 250=0.58596, 500=0.54452 (USD)", RoHS=No, Series=JS, Stock=20641, Supplier=Digikey, Switch Function=On-On, Switch Travel=2mm, Throw Configuration=DPDT
J11 J12: library part 430450400, "MOLEX 43045-0400 Header, Dual Row, 90°, 4p, Tin Plating Snap-in Peg PCB Lock, GW Compatible", Case/Package=101Case, Color=Black, Contact Resistance=10mR, Current Rating=5A, Flammability Rating=5813Flammability, Manufacturer=Molex, Manufacturer Part Number=43045-0400, Max Operating Temperature=105°C, Max Voltage Rating (AC)=250V, Max Voltage Rating (DC)=250.25kV, Min Operating Temperature=-40°C, Supplier Part Number=WM1814-ND, Voltage Rating=600V, Approvals=UL,CSA,TUV, Category="Headers and Wire Housings", ComponentLink1Description=https://datasheet.ciiva.com/11746/0900766b80027348-11746988.pdf?src-supplier=Rs, ComponentLink1URL=https://datasheet.ciiva.com/11746/0900766b80027348-11746988.pdf?src-supplier=Rs, Contact Gender=Male, Contact Material=Brass,Tin, Contact Plating=Tin, Contact Type="Male Pin", Depth=12.2mm, Diameter=3mm, Fastening Type=Ramp, Gender=Male, Glow Wire Compliant=15Compliance, Halogen Free=5696HalogenFree, Housing Color=Black, Housing Material=Thermoplastic, Lead Free=5697LeadFree, Lead Pitch=3mm, Length=10.15mm, Material=Polyester, Mounting Technology="Through Hole", Number of Circuits=4, Number of Contacts=4, Number of Poles=4, Number of Positions=4, Number of Rows=2, Orientation="Right Angle", Packaging=Tray, Pitch=3mm, Plating=154ConductorMaterial, Pricing="1=1.51, 10=1.289, 80=1.065, 2232=0.8128, 6696=0.74553, 11160=0.72872 (USD)", Radiation Hardening=No, Reach SVHC Compliant=Unknown, RoHS=Yes, RoHS Compliant=Yes, Row Spacing=0.118inch, Series="Micro-Fit 3.0™ 43045", Stock=4691, Supplier=Digikey, Termination=Solder, Voltage Rating (AC)=250V, Voltage Rating (DC)=250V, Width=9.9mm, Working Voltage=250V
R1 R2 R3 R5: library part RC1005F103CS, "Res Thick Film 0402 10K Ohm 1% 1/16W ±100ppm/°C Molded SMD SMD T/R", Case Code (Imperial)=0402, Case Code (Metric)=1005, Manufacturer=Samsung, Max Operating Temperature=155°C, Max Power Dissipation=63mW, Min Operating Temperature=-55°C, Package Quantity=1, Supplier Part Number=1276-3431-1-ND, Temperature Coefficient=100ppm/°C, Tolerance=1%, Voltage Rating=50V, Case/Package=0402, Category="Chip SMD Resistors", ComponentLink1Description=https://datasheet.ciiva.com/15196/getdatasheetpartid-504789-15196214.pdf?src-supplier=Verical, ComponentLink1URL=https://datasheet.ciiva.com/15196/getdatasheetpartid-504789-15196214.pdf?src-supplier=Verical, ComponentLink2Description=https://datasheet.ciiva.com/16481/rcseries-16481007.pdf?src-supplier=Future+Electronics, ComponentLink2URL=https://datasheet.ciiva.com/16481/rcseries-16481007.pdf?src-supplier=Future+Electronics, Construction=Rectangular, Contact Plating=Tin, Depth=0.5mm, Features="Moisture Resistant", Height=0.016inch, Lead Free=5697LeadFree, Length=0.039inch, Manufacturer Part Number=RC1005F103CS, Military Standard=Not, Number of Terminations=2, Packaging="Tape and Reel", Power Rating=63mW, Pricing="1=0.1, 10=0.024, 50=0.0156, 100=0.0132, 500=0.00922, 1000=0.00803, 5000=0.00598 (USD)", Radiation Hardening=No, RoHS=Yes, RoHS Compliant=Yes, Series=RC, Stock=15479730, Supplier=Digikey, Thickness=350um, Voltage Rating (DC)=50V, Width=0.02inch
R4: library part RC0402FR-0714KL2, Supplier Part Number 1=5614672, Supplier 1="Future Electronics"
R6 R7 R8 R9 R10 R11 R12 R13 R14 R15: library part RC0402FR-0768RL, "SMD Chip Resistor, 68 Ohm, ± 1%, 63 mW, 0402 [1005 Metric], Thick Film, General Purpose", Case Code (Imperial)=0402, Case Code (Metric)=1005, Manufacturer=Yageo, Max Operating Temperature=155°C, Max Power Dissipation=63mW, Min Operating Temperature=-55°C, Package Quantity=1, Resistance Tolerance=1%, Resistor Type="Thick Film", Supplier Part Number=311-68.0LRCT-ND, Temperature Coefficient=100ppm/°C, Voltage Rating=50V, Case/Package=0402, Category="Chip SMD Resistors", ComponentLink1Description=https://datasheet.ciiva.com/2453/pyu-r-int-thick-7-2453524.pdf?src-supplier=Digikey, ComponentLink1URL=https://datasheet.ciiva.com/2453/pyu-r-int-thick-7-2453524.pdf?src-supplier=Digikey, ComponentLink2Description=https://datasheet.ciiva.com/2453/pyu-r-int-thick-7-2453525.pdf?src-supplier=Digikey, ComponentLink2URL=https://datasheet.ciiva.com/2453/pyu-r-int-thick-7-2453525.pdf?src-supplier=Digikey, ComponentLink3Description=https://datasheet.ciiva.com/2453/pyu-r-int-thick-7-2453523.pdf?src-supplier=Digikey, ComponentLink3URL=https://datasheet.ciiva.com/2453/pyu-r-int-thick-7-2453523.pdf?src-supplier=Digikey, ComponentLink4Description=https://datasheet.ciiva.com/5558/pyu-rc0402-51-rohs-l-6-r-5558023.pdf?src-supplier=Mouser, ComponentLink4URL=https://datasheet.ciiva.com/5558/pyu-rc0402-51-rohs-l-6-r-5558023.pdf?src-supplier=Mouser, ComponentLink5Description=https://datasheet.ciiva.com/7850/1018594-7850074.pdf?src-supplier=Element14, ComponentLink5URL=https://datasheet.ciiva.com/7850/1018594-7850074.pdf?src-supplier=Element14, ComponentLink6Description=https://datasheet.ciiva.com/7850/1018594-7850075.pdf?src-supplier=Element14, ComponentLink6URL=https://datasheet.ciiva.com/7850/1018594-7850075.pdf?src-supplier=Element14, ComponentLink7Description=https://datasheet.ciiva.com/15189/getdatasheetpartid-325392-15189501.pdf?src-supplier=Verical, ComponentLink7URL=https://datasheet.ciiva.com/15189/getdatasheetpartid-325392-15189501.pdf?src-supplier=Verical, Construction=Rectangular, Depth=0.5mm, Features="Moisture Resistant", Height=0.016inch, Lead Free="Lead Free", Length=0.039inch, Manufacturer Part Number=RC0402FR-0768RL, Military Standard=Not, Number of Terminations=2, Packaging="Tape and Reel", Power Rating=63mW, Pricing="1=0.1, 10=0.015, 50=0.0088, 100=0.0073, 500=0.00488, 1000=0.00417, 5000=0.00297 (USD)", Reach SVHC Compliant=No, RoHS=Yes, RoHS Compliant=Yes, Series=RC, Stock=982905, Supplier=Digikey, Termination=SMD/SMT, Tolerance=1%, Voltage Rating (AC)=50V, Width=0.02inch
R16: library part RC0402FR-07150RL, "SMD Chip Resistor, 150 Ohm, ± 1%, 63 mW, 0402 [1005 Metric], Thick Film, General Purpose", Case Code (Imperial)=0402, Case Code (Metric)=1005, Manufacturer=Yageo, Max Operating Temperature=155°C, Max Power Dissipation=63mW, Min Operating Temperature=-55°C, Package Quantity=1, Resistance Tolerance=1%, Resistor Type="Thick Film", Supplier Part Number=311-150LRCT-ND, Temperature Coefficient=100ppm/°C, Voltage Rating=50V, Case/Package=0402, Category="Chip SMD Resistors", ComponentLink1Description=https://datasheet.ciiva.com/11808/0900766b80c66297-11808422.pdf?src-supplier=Rs, ComponentLink1URL=https://datasheet.ciiva.com/11808/0900766b80c66297-11808422.pdf?src-supplier=Rs, ComponentLink2Description=https://datasheet.ciiva.com/5558/pyu-rc0402-51-rohs-l-6-r-5558110.pdf?src-supplier=Mouser, ComponentLink2URL=https://datasheet.ciiva.com/5558/pyu-rc0402-51-rohs-l-6-r-5558110.pdf?src-supplier=Mouser, Construction=Rectangular, Depth=0.5mm, Features="Moisture Resistant", Height=0.016inch, Lead Free="Lead Free", Length=0.039inch, Manufacturer Part Number=RC0402FR-07150RL, Military Standard=Not, Number of Terminations=2, Packaging="Tape and Reel", Power Rating=63mW, Pricing="1=0.1, 10=0.015, 50=0.0088, 100=0.0073, 500=0.00488, 1000=0.00417, 5000=0.00297 (USD)", Reach SVHC Compliant=Unknown, RoHS=Yes, RoHS Compliant=Yes, Series=RC, Stock=5570890, Supplier=Digikey, Technology="THICK FILM", Termination=SMD/SMT, Tolerance=1%, Voltage Rating (AC)=50V, Width=0.02inch, Working Voltage=50V
R17: library part RC0402FR-071K15L, "SMD Chip Resistor, 1.15 kOhm, ± 1%, 63 mW, 0402 [1005 Metric], Thick Film, General Purpose", Case Code (Imperial)=0402, Case Code (Metric)=1005, Manufacturer=Yageo, Max Operating Temperature=155°C, Max Power Dissipation=63mW, Min Operating Temperature=-55°C, Power Rating=62.5mW, Supplier Part Number=YAG3033CT-ND, Temperature Coefficient=100ppm/°C, Tolerance=1%, Voltage Rating=50V, Case/Package=0402, Category="Chip SMD Resistors", ComponentLink1Description=https://datasheet.ciiva.com/8895/pyu-rc0402-51-rohs-l-6-8895884.pdf?src-supplier=Avnet, ComponentLink1URL=https://datasheet.ciiva.com/8895/pyu-rc0402-51-rohs-l-6-8895884.pdf?src-supplier=Avnet, ComponentLink2Description=https://datasheet.ciiva.com/26829/getdatasheetpartid-326427-26829948.pdf?src-supplier=Verical, ComponentLink2URL=https://datasheet.ciiva.com/26829/getdatasheetpartid-326427-26829948.pdf?src-supplier=Verical, Construction=Rectangular, Contact Plating=Tin,Lead, Depth=0.5mm, Features="Moisture Resistant", Height=0.016inch, Lead Free="Lead Free", Length=1mm, Manufacturer Part Number=RC0402FR-071K15L, Military Standard=Not, Number of Terminations=2, Packaging="Tape and Reel", Pricing="1=0.1, 10=0.015, 50=0.0088, 100=0.0073, 500=0.00488, 1000=0.00417, 5000=0.00297 (USD)", RoHS=Yes, RoHS Compliant=Yes, Series=RC, Stock=290462, Supplier=Digikey, Termination=SMD/SMT, Voltage Rating (DC)=50V, Width=0.5mm
R18: library part RC0402FR-0766K5L, "SMD Chip Resistor, 66.5 kOhm, ± 1%, 63 mW, 0402 [1005 Metric], Thick Film, General Purpose", Case Code (Imperial)=0402, Case Code (Metric)=1005, Manufacturer=Yageo, Max Operating Temperature=155°C, Max Power Dissipation=63mW, Min Operating Temperature=-55°C, Power Rating=62.5mW, Supplier Part Number=YAG3209CT-ND, Temperature Coefficient=100ppm/°C, Tolerance=1%, Voltage Rating=50V, Case/Package=0402, Category="Chip SMD Resistors", ComponentLink1Description=https://datasheet.ciiva.com/8888/pyu-rc0402-51-rohs-l-6-8888485.pdf?src-supplier=Avnet, ComponentLink1URL=https://datasheet.ciiva.com/8888/pyu-rc0402-51-rohs-l-6-8888485.pdf?src-supplier=Avnet, Contact Plating=Tin,Matte, Features="Moisture Resistant", Height=0.016inch, Lead Free="Lead Free", Length=0.039inch, Manufacturer Part Number=RC0402FR-0766K5L, Number of Terminations=2, Packaging="Tape and Reel", Pricing="1=0.1, 10=0.015, 50=0.0088, 100=0.0073, 500=0.00488, 1000=0.00417, 5000=0.00297 (USD)", RoHS=Yes, RoHS Compliant=Yes, Series=RC, Stock=358270, Supplier=Digikey, Termination=SMD/SMT, Width=0.5mm
R19 R20: library part RC0402FR-07100KL, "SMD Chip Resistor, 100 kOhm, ± 1%, 63 mW, 0402 [1005 Metric], Thick Film, General Purpose", Case Code (Imperial)=0402, Case Code (Metric)=1005, Manufacturer=Yageo, Max Operating Temperature=155°C, Max Power Dissipation=63mW, Min Operating Temperature=-55°C, Package Quantity=1, Resistance Tolerance=1%, Resistor Type="Thick Film", Supplier Part Number=311-100KLRCT-ND, Temperature Coefficient=100ppm/°C, Voltage Rating=50V, Case/Package=0402, Category="Chip SMD Resistors", ComponentLink1Description=https://datasheet.ciiva.com/11819/0900766b80c66297-11819452.pdf?src-supplier=Rs, ComponentLink1URL=https://datasheet.ciiva.com/11819/0900766b80c66297-11819452.pdf?src-supplier=Rs, ComponentLink2Description=https://datasheet.ciiva.com/22747/1018594-22747509.pdf?src-supplier=Element14, ComponentLink2URL=https://datasheet.ciiva.com/22747/1018594-22747509.pdf?src-supplier=Element14, ComponentLink3Description=https://datasheet.ciiva.com/2453/pyu-r-int-thick-7-2453362.pdf?src-supplier=Digikey, ComponentLink3URL=https://datasheet.ciiva.com/2453/pyu-r-int-thick-7-2453362.pdf?src-supplier=Digikey, ComponentLink4Description=https://datasheet.ciiva.com/12667/pyu-rc0402-51-rohs-l-6-r-12667930.pdf?src-supplier=Mouser, ComponentLink4URL=https://datasheet.ciiva.com/12667/pyu-rc0402-51-rohs-l-6-r-12667930.pdf?src-supplier=Mouser, ComponentLink5Description=https://datasheet.ciiva.com/15189/getdatasheetpartid-323696-15189334.pdf?src-supplier=Verical, ComponentLink5URL=https://datasheet.ciiva.com/15189/getdatasheetpartid-323696-15189334.pdf?src-supplier=Verical, ComponentLink6Description=https://datasheet.ciiva.com/2453/pyu-r-int-thick-7-2453363.pdf?src-supplier=Digikey, ComponentLink6URL=https://datasheet.ciiva.com/2453/pyu-r-int-thick-7-2453363.pdf?src-supplier=Digikey, ComponentLink7Description=https://datasheet.ciiva.com/2453/pyu-r-int-thick-7-2453361.pdf?src-supplier=Digikey, ComponentLink7URL=https://datasheet.ciiva.com/2453/pyu-r-int-thick-7-2453361.pdf?src-supplier=Digikey, Construction=Rectangular, Depth=0.5mm, Features="Moisture Resistant", Height=0.016inch, Lead Free=5697LeadFree, Length=0.039inch, Manufacturer Part Number=RC0402FR-07100KL, Military Standard=Not, Number of Terminations=2, Packaging="Tape and Reel", Power Rating=63mW, Pricing="1=0.1, 10=0.015, 50=0.0088, 100=0.0073, 500=0.00488, 1000=0.00417, 5000=0.00297 (USD)", Reach SVHC Compliant=No, RoHS=Yes, RoHS Compliant=Yes, Series=RC, Stock=21909209, Supplier=Digikey, Technology="THICK FILM", Termination=SMD/SMT, Tolerance=1%, Voltage Rating (AC)=50V, Width=0.02inch
R21: library part RC0402FR-0749K9L, Supplier Part Number 1=3276235, Supplier 1="Future Electronics"
U1: "MCU 32-bit ARM Cortex M4 RISC 512KB Flash 2.5V/3.3V Medical 64-Pin LQFP Frame", Case/Package=LQFP, Frequency=180MHz, Manufacturer=STMicroelectronics, Max Operating Temperature=85°C, Max Supply Voltage=3.6V, Min Operating Temperature=-40°C, Min Supply Voltage=1.7V, Nominal Supply Current=1.12uA, Supplier Part Number=497-15376-ND, Category=Microcontrollers, ComponentLink1Description=http://www.farnell.com/datasheets/2309063.pdf?src-supplier=Farnell, ComponentLink1URL=http://www.farnell.com/datasheets/2309063.pdf?src-supplier=Farnell, ComponentLink2Description=http://www.mouser.com/ds/2/389/stm32f446mc-956216.pdf?src-supplier=Mouser, ComponentLink2URL=http://www.mouser.com/ds/2/389/stm32f446mc-956216.pdf?src-supplier=Mouser, ComponentLink3Description=https://datasheet.octopart.com/STM32F446RET6-STMicroelectronics-datasheet-58295083.pdf?src-supplier=Future+Electronics, ComponentLink3URL=https://datasheet.octopart.com/STM32F446RET6-STMicroelectronics-datasheet-58295083.pdf?src-supplier=Future+Electronics, ComponentLink4Description=http://www.st.com/content/ccc/resource/technical/document/datasheet/65/cb/75/50/53/d6/48/24/DM00141306.pdf/files/DM00141306.pdf/jcr:content/translations/en.DM00141306.pdf?src-supplier=Digikey, ComponentLink4URL=http://www.st.com/content/ccc/resource/technical/document/datasheet/65/cb/75/50/53/d6/48/24/DM00141306.pdf/files/DM00141306.pdf/jcr:content/translations/en.DM00141306.pdf?src-supplier=Digikey, ComponentLink5Description=https://datasheet.octopart.com/STM32F446RET6-STMicroelectronics-datasheet-41797127.pdf?src-supplier=Element14, ComponentLink5URL=https://datasheet.octopart.com/STM32F446RET6-STMicroelectronics-datasheet-41797127.pdf?src-supplier=Element14, ComponentLink6Description=http://www.farnell.com/datasheets/2309063.pdf?src-supplier=Newark, ComponentLink6URL=http://www.farnell.com/datasheets/2309063.pdf?src-supplier=Newark, ComponentLink7Description=http://www.farnell.com/datasheets/2309063.pdf?src-supplier=Element14, ComponentLink7URL=http://www.farnell.com/datasheets/2309063.pdf?src-supplier=Element14, ComponentLink8Description=https://datasheet.octopart.com/STM32F446RET6-STMicroelectronics-datasheet-83961502.pdf?src-supplier=SHENGYU+ELECTRONICS, ComponentLink8URL=https://datasheet.octopart.com/STM32F446RET6-STMicroelectronics-datasheet-83961502.pdf?src-supplier=SHENGYU+ELECTRONICS, Core Architecture=ARM, Density=512KB, Height=1.6mm, Interface=I2C,SPI,USB,CAN,IrDA,SD,UART,USART,LIN,EBI/EMI, Lead Free="Lead Free", Manufacturer Part Number=STM32F446RET6, Memory Format=FLASH, Memory Size=512KB, Number of A/D Converters=3NUMBER, Number of ADC Channels=16NUMBER, Number of Channels=16NUMBER, Number of D/A Converters=2NUMBER, Number of I2C Channels=4NUMBER, Number of I/Os=50, Number of PWM Channels=4NUMBER, Number of SPI Channels=3NUMBER, Number of UART Channels=2NUMBER, Number of USB Channels=2NUMBER, Oscillator Type=Internal, Packaging=Tray, Peripherals="Brown-out Detect/Reset,POR,PWM,WDT,DMA,LVD", Pins=64, Pricing="1=10.05, 10=9.077, 25=8.6544, 160=7.51463, 320=7.17688, 480=6.54363, 960=5.69929 (USD)", RAM Size=128KB, Reach SVHC Compliant=No, RoHS=Yes, RoHS Compliant=Yes, Series="STM32 F4", Stock=9780, Supplier=Digikey
U3: library part SN65HVD232DR, "EAR99 65HVD232 Tape & Reel (TR) CANbus interface receiver 100mV 17mA 72.603129mg 1Mbps", Case/Package=D, Manufacturer="Texas Instruments", Max Operating Temperature=85°C, Max Supply Voltage=3.6V, Min Operating Temperature=-40°C, Min Supply Voltage=3V, Package Quantity=2500, Supplier Part Number=296-26344-1-ND, Supply Current=17mA, Category="Interface ICs", ComponentLink1Description=https://datasheet.ciiva.com/1771/sn65hvd230-1771113.pdf?src-supplier=Digikey, ComponentLink1URL=https://datasheet.ciiva.com/1771/sn65hvd230-1771113.pdf?src-supplier=Digikey, ComponentLink2Description=https://datasheet.ciiva.com/1771/sn65hvd230-1771112.pdf?src-supplier=Digikey, ComponentLink2URL=https://datasheet.ciiva.com/1771/sn65hvd230-1771112.pdf?src-supplier=Digikey, ComponentLink3Description=https://datasheet.ciiva.com/1771/sn65hvd230-1771114.pdf?src-supplier=Digikey, ComponentLink3URL=https://datasheet.ciiva.com/1771/sn65hvd230-1771114.pdf?src-supplier=Digikey, ComponentLink4Description=https://datasheet.ciiva.com/15149/getdatasheetpartid-107534-15149958.pdf?src-supplier=Verical, ComponentLink4URL=https://datasheet.ciiva.com/15149/getdatasheetpartid-107534-15149958.pdf?src-supplier=Verical, Data Rate=1Mbps, Lead Free="Lead Free", Manufacturer Part Number=SN65HVD232DR, Number of Drivers=1, Number of Receive Buffers=1, Number of Receivers=1, Number of Transceivers=1, Number of Transmit Buffers=1, Packaging="Tape and Reel", Pins=8, Pricing="1=2.5, 10=2.246, 25=2.1184, 100=1.8049, 250=1.6948, 500=1.48294, 1000=1.22872 (USD)", Radiation Hardening=No, Reach SVHC Compliant=No, Receiver Hysteresis=100mV, RoHS=Yes, RoHS Compliant=Yes, Series=-, Simplex/Duplex="Half Duplex", Stock=18370, Supplier=Digikey, Weight=0.002561oz
U4 U5 U6: library part JS202011JCQN, "SWITCH SLIDE DPDT 300mA 6V", Manufacturer="ITT C&K", Max Operating Temperature=85°C, Min Operating Temperature=-40°C, Supplier Part Number=CKN10723CT-ND, Voltage Rating (DC)=6V, Actuator Length=2mm, Actuator Material=Nylon,Polyamide,PA46, Actuator Type=Standard, Category="Slide Switches", ComponentLink1Description=http://www.farnell.com/datasheets/2674788.pdf?src-supplier=Farnell, ComponentLink1URL=http://www.farnell.com/datasheets/2674788.pdf?src-supplier=Farnell, ComponentLink2Description=http://www.farnell.com/datasheets/2674788.pdf?src-supplier=Element14, ComponentLink2URL=http://www.farnell.com/datasheets/2674788.pdf?src-supplier=Element14, ComponentLink3Description=https://datasheet.octopart.com/JS202011JCQN-C%26K-Components-datasheet-67873653.pdf?src-supplier=Newark, ComponentLink3URL=https://datasheet.octopart.com/JS202011JCQN-C%26K-Components-datasheet-67873653.pdf?src-supplier=Newark, ComponentLink4Description=http://www.farnell.com/datasheets/2674788.pdf?src-supplier=Newark, ComponentLink4URL=http://www.farnell.com/datasheets/2674788.pdf?src-supplier=Newark, ComponentLink5Description=https://www.ckswitches.com/media/1422/js.pdf?src-supplier=Digikey, ComponentLink5URL=https://www.ckswitches.com/media/1422/js.pdf?src-supplier=Digikey, ComponentLink6Description=https://datasheet.octopart.com/JS202011JCQN-C%26K-Components-datasheet-138126065.pdf?src-supplier=TME, ComponentLink6URL=https://datasheet.octopart.com/JS202011JCQN-C%26K-Components-datasheet-138126065.pdf?src-supplier=TME, Contact Material="Copper Alloy", Contact Plating=Silver, Electrical Life=5000Cycles, Manufacturer Part Number=JS202011JCQN, Mounting Technology="Surface Mount", Packaging="Cut Tape", Pricing="1=0.8, 10=0.769, 25=0.74, 100=0.6422, 250=0.58596, 500=0.54452 (USD)", RoHS=No, Series=JS, Stock=20641, Supplier=Digikey, Switch Function=On-On, Switch Travel=2mm, Throw Configuration=DPDT
U7: library part MAX488CSA+T, "MAX488 Series 0.25 Mbps 12 V Full Duplex SMT RS 485 Transceiver - SOIC-8", Case/Package=SOIC, Manufacturer=Maxim, Max Operating Temperature=70°C, Min Operating Temperature=0°C, Operating Supply Voltage=5V, Package Quantity=2500, Supplier Part Number=MAX488CSA+TCT-ND, Supply Current=250uA, Category="Buffers, Drivers and Transceivers", ComponentLink1Description=https://datasheet.ciiva.com/14430/max1487-max491-14430333.pdf?src-supplier=Avnet, ComponentLink1URL=https://datasheet.ciiva.com/14430/max1487-max491-14430333.pdf?src-supplier=Avnet, ComponentLink2Description=https://datasheet.ciiva.com/14430/max1487-max491-14430886.pdf?src-supplier=Avnet, ComponentLink2URL=https://datasheet.ciiva.com/14430/max1487-max491-14430886.pdf?src-supplier=Avnet, ComponentLink3Description=https://datasheet.ciiva.com/1774/max1487-max491-1774524.pdf?src-supplier=Digikey, ComponentLink3URL=https://datasheet.ciiva.com/1774/max1487-max491-1774524.pdf?src-supplier=Digikey, Data Rate=250Kbps, Lead Free="Lead Free", Logic Function=Transceiver,Receiver, Manufacturer Part Number=MAX488CSA+T, Mounting Technology="Surface Mount", Number of Drivers=1, Number of Receivers=1, Number of Transceivers=1, Number of Transmitters=1, Packaging="Tape and Reel", Pricing="1=4.22, 10=3.788, 25=3.5808, 100=3.1034, 250=2.9442, 500=2.64184, 1000=2.22805 (USD)", Radiation Hardening=No, RoHS=Yes, RoHS Compliant=Yes, Series=-, Stock=8351, Supplier=Digikey
X1: library part TS321ILT, "IC OPAMP GP 800KHZ SOT23-5", Case/Package=SOT-23, Dual Supply Voltage=9V, Input Bias Current=150nA, Input Offset Voltage (Vos)=4mV, Manufacturer=STMicroelectronics, Max Dual Supply Voltage=15V, Max Operating Temperature=125°C, Max Supply Current=800uA, Max Supply Voltage=30V, Min Dual Supply Voltage=1.5V, Min Input Voltage=0V, Min Operating Temperature=-40°C, Min Supply Voltage=3V, Operating Supply Current=600uA, Output Current=40mA, Package Quantity=3000, Power Supply Rejection Ratio (PSRR)=110dB, Supplier Part Number=497-4061-1-ND, Voltage Gain=100dB, Amplifier Type="GENERAL PURPOSE", Bandwidth=800kHz, Category="Amplifiers - Op Amps, Buffer, Instrumentation", Common Mode Rejection Ratio=65dB, ComponentLink1Description=https://datasheet.ciiva.com/1795/cd00001647-1795918.pdf?src-supplier=Digikey, ComponentLink1URL=https://datasheet.ciiva.com/1795/cd00001647-1795918.pdf?src-supplier=Digikey, Gain Bandwidth Product=800kHz, Height=1.3mm, Input Offset Voltage-Max=4mV, Lead Free="Lead Free", Length=3mm, Manufacturer Part Number=TS321ILT, Moisture Sensitivity Level=1, Mounting Technology="Surface Mount", Number of Amplifiers=1, Number of Channels=1, Number of Circuits=1, Number of Elements=1, Operating Supply Voltage=15V, Output Current per Channel=40mA, Packaging="Tape and Reel", Pins=5, Pricing="1=0.52, 10=0.447, 25=0.4176, 100=0.334, 250=0.31012, 500=0.26242, 1000=0.20278 (USD)", Radiation Hardening=No, Reach SVHC Compliant=No, RoHS=Yes, RoHS Compliant=Yes, Series=-, Slew Rate=0.4V/µs, Slew Rate-Nom=0.4V/µs, Stock=65051, Supplier=Digikey, Supply Current=800uA, Technology=BIPOLAR, Unity Gain Bandwidth Product=800kHz, Width=1.75mm

## Free pads (board coordinates)
  round 250 on Mech1: 1(200,200) 2(4050,200) 3(4045.67,2561.02) 4(200,2550)

## Via types
v1: diameter 50, hole 28, Top Layer to Bottom Layer, 85 vias

## Nets (pads, with @x,y where several pads share a name; then routed paths per layer and width w, separated by ;. In a path a pad name is that pad's centre, name@x,y a point inside that pad or via, vN(x,y) a via of type N, cw(c..) or ccw(c..) an arc to the next point about the centre after c; other vN are vias at no path point)
3V3: C1.1 C2.1 C3.1 C4.1 C5.1 C6.1 C8.1 C9.1 C10.1 C15.1 C16.1 J4.3 R1.2 R2.2 R3.2 R15.2 U1.1 U1.13 U1.19 U1.32 U1.48 U1.64 U3.3 | length 6597.3
  Top Layer w10: U1.13 1998.58,1261.42 ; U1.1 1917.71,1498.79 1968.79,1498.79 1980,1510 1991.92,1521.92 1991.92,1573 U1.64 ; 2000,1210 2031.29,1178.71 2031.29,1127 U1.19 ; 2283.78,1491.42 2290,1497.64 U1.48
  Top Layer w20: R15.2 1480,700 1600.35,820.35 1819.65,820.35 1890,750 2020,750 ; v1(1880,980) 2021.74,980 2021.74,900.58 C2.1 C3.1 2020,807.68 2020,750 ; v1(1880.44,1161.27) 1881.71,1160 1940,1160 1998.58,1218.58 1998.58,1261.42 1998.58,1491.42 ; 1980,1510 1998.58,1491.42 ; R3.2 2000,730 2020,750 ; 2283.78,1491.42 1998.58,1491.42 ; U1.32@2291.49,1113.03 2415.58,1113.03 ; R2.2 2350,750 ; C5.1@2398.7,908.03 2457.02,908.03 C9.1 C10.1 2459.16,816.01 2455.17,820 C6.1 2397.4,752.6 2549.06,752.6 2708.19,593.46 2709.84,593.46 2710,593.31 R1.2 ; C5.1 2398.7,998.03 2397.4,999.33 C4.1 C8.1 2461.16,1038.84 2422.71,1077.29 2422.71,1132.71 v1(2470,1180) ; v1(2570,1350) 2573.08,1353.08 2662.52,1353.08 2665,1355.56 2668.24,1352.32 C15.1 ; C15.1@2790,1355.32 2793.24,1352.08 2802.88,1352.08 2804.95,1350 U3.3
  Top Layer w50: 2020,750 v1(2220,750) 2350,750 2397.4,750 ; v1(3640,1120) 3643.9,1123.9 J4.3
  Bottom Layer w20: v1(1880,980) 1880.22,980.22 1880.22,1161.05 v1(1880.44,1161.27) ; v1(2470,1180) 2470,1250 v1(2570,1350)
  Bottom Layer w50: v1(2220,750) 3270,750 v1(3640,1120)
5V: J4.2 J6.1 J11.1 R16.2 U7.1 X1.4 | length 10394.2
  Top Layer w20: R16.2 1657.12,664.76 1681.88,640 v1(1690,640) ; v1(1840,500) 1840,110 1900,50 v1(3010,50) ; v1(3020.11,292.58) 3112.6,385.07 X1.4
  Top Layer w50: v1(294.47,1600.01) 296.48,1598 386.48,1598 U7.1 ; J4.2 3650,1450 v1(3800,1600)
  Bottom Layer w20: v1(1690,640) 1695,640 1835,500 v1(1840,500) ; v1(3020.11,292.58) 3015.05,287.53 3015.05,55.05 v1(3010,50) 3670,50 4080,460 4080,1320 v1(3800,1600)
  Bottom Layer w50: v1(294.47,1600.01) 294.47,1866.47 J6.1 697.91,2269.92 778.96,2269.92 967.07,2458.03 1933.47,2458.03 2217.61,2173.9 J11.1 2746.97,2249.92 3133.8,2249.92 3383.88,2500 3770.71,2500 3800,2470.71 v1(3800,1600)
21,6-25,2: J4.1 J12.1 R17.2 X1.5 | length 6709.8
  Top Layer w20: R17.2 1780,665.91 1780.83,665.08 1799.11,665.08 1890,574.19 1890,160 1950,100 3670.71,100 3970,399.29 3970,440 3920,490
  Top Layer w50: X1.5 3187.4,482.6 3300,370 3800,370 3920,490 4110,680 4110,1470 3827.89,1752.11 ; J12.1 3426.97,2239.92 3459.92,2239.92 3500,2280 3850,2280 3960,2170 3960,1884.21 3827.89,1752.11 ; J4.1 3827.89,1752.11
+12: J9.4 R4.2 X1.1 | length 5837